# Altium PCB PCB1.PcbDoc (part 6 of 12)
Units mm, origin at the board's own origin, x right, y up, seen from the top; angles counter-clockwise.
Board outline 122.17 x 121.67 mm, 2 copper layers (Top Layer, Bottom Layer); 274 components, 225 nets, 941 pads, 421 vias.
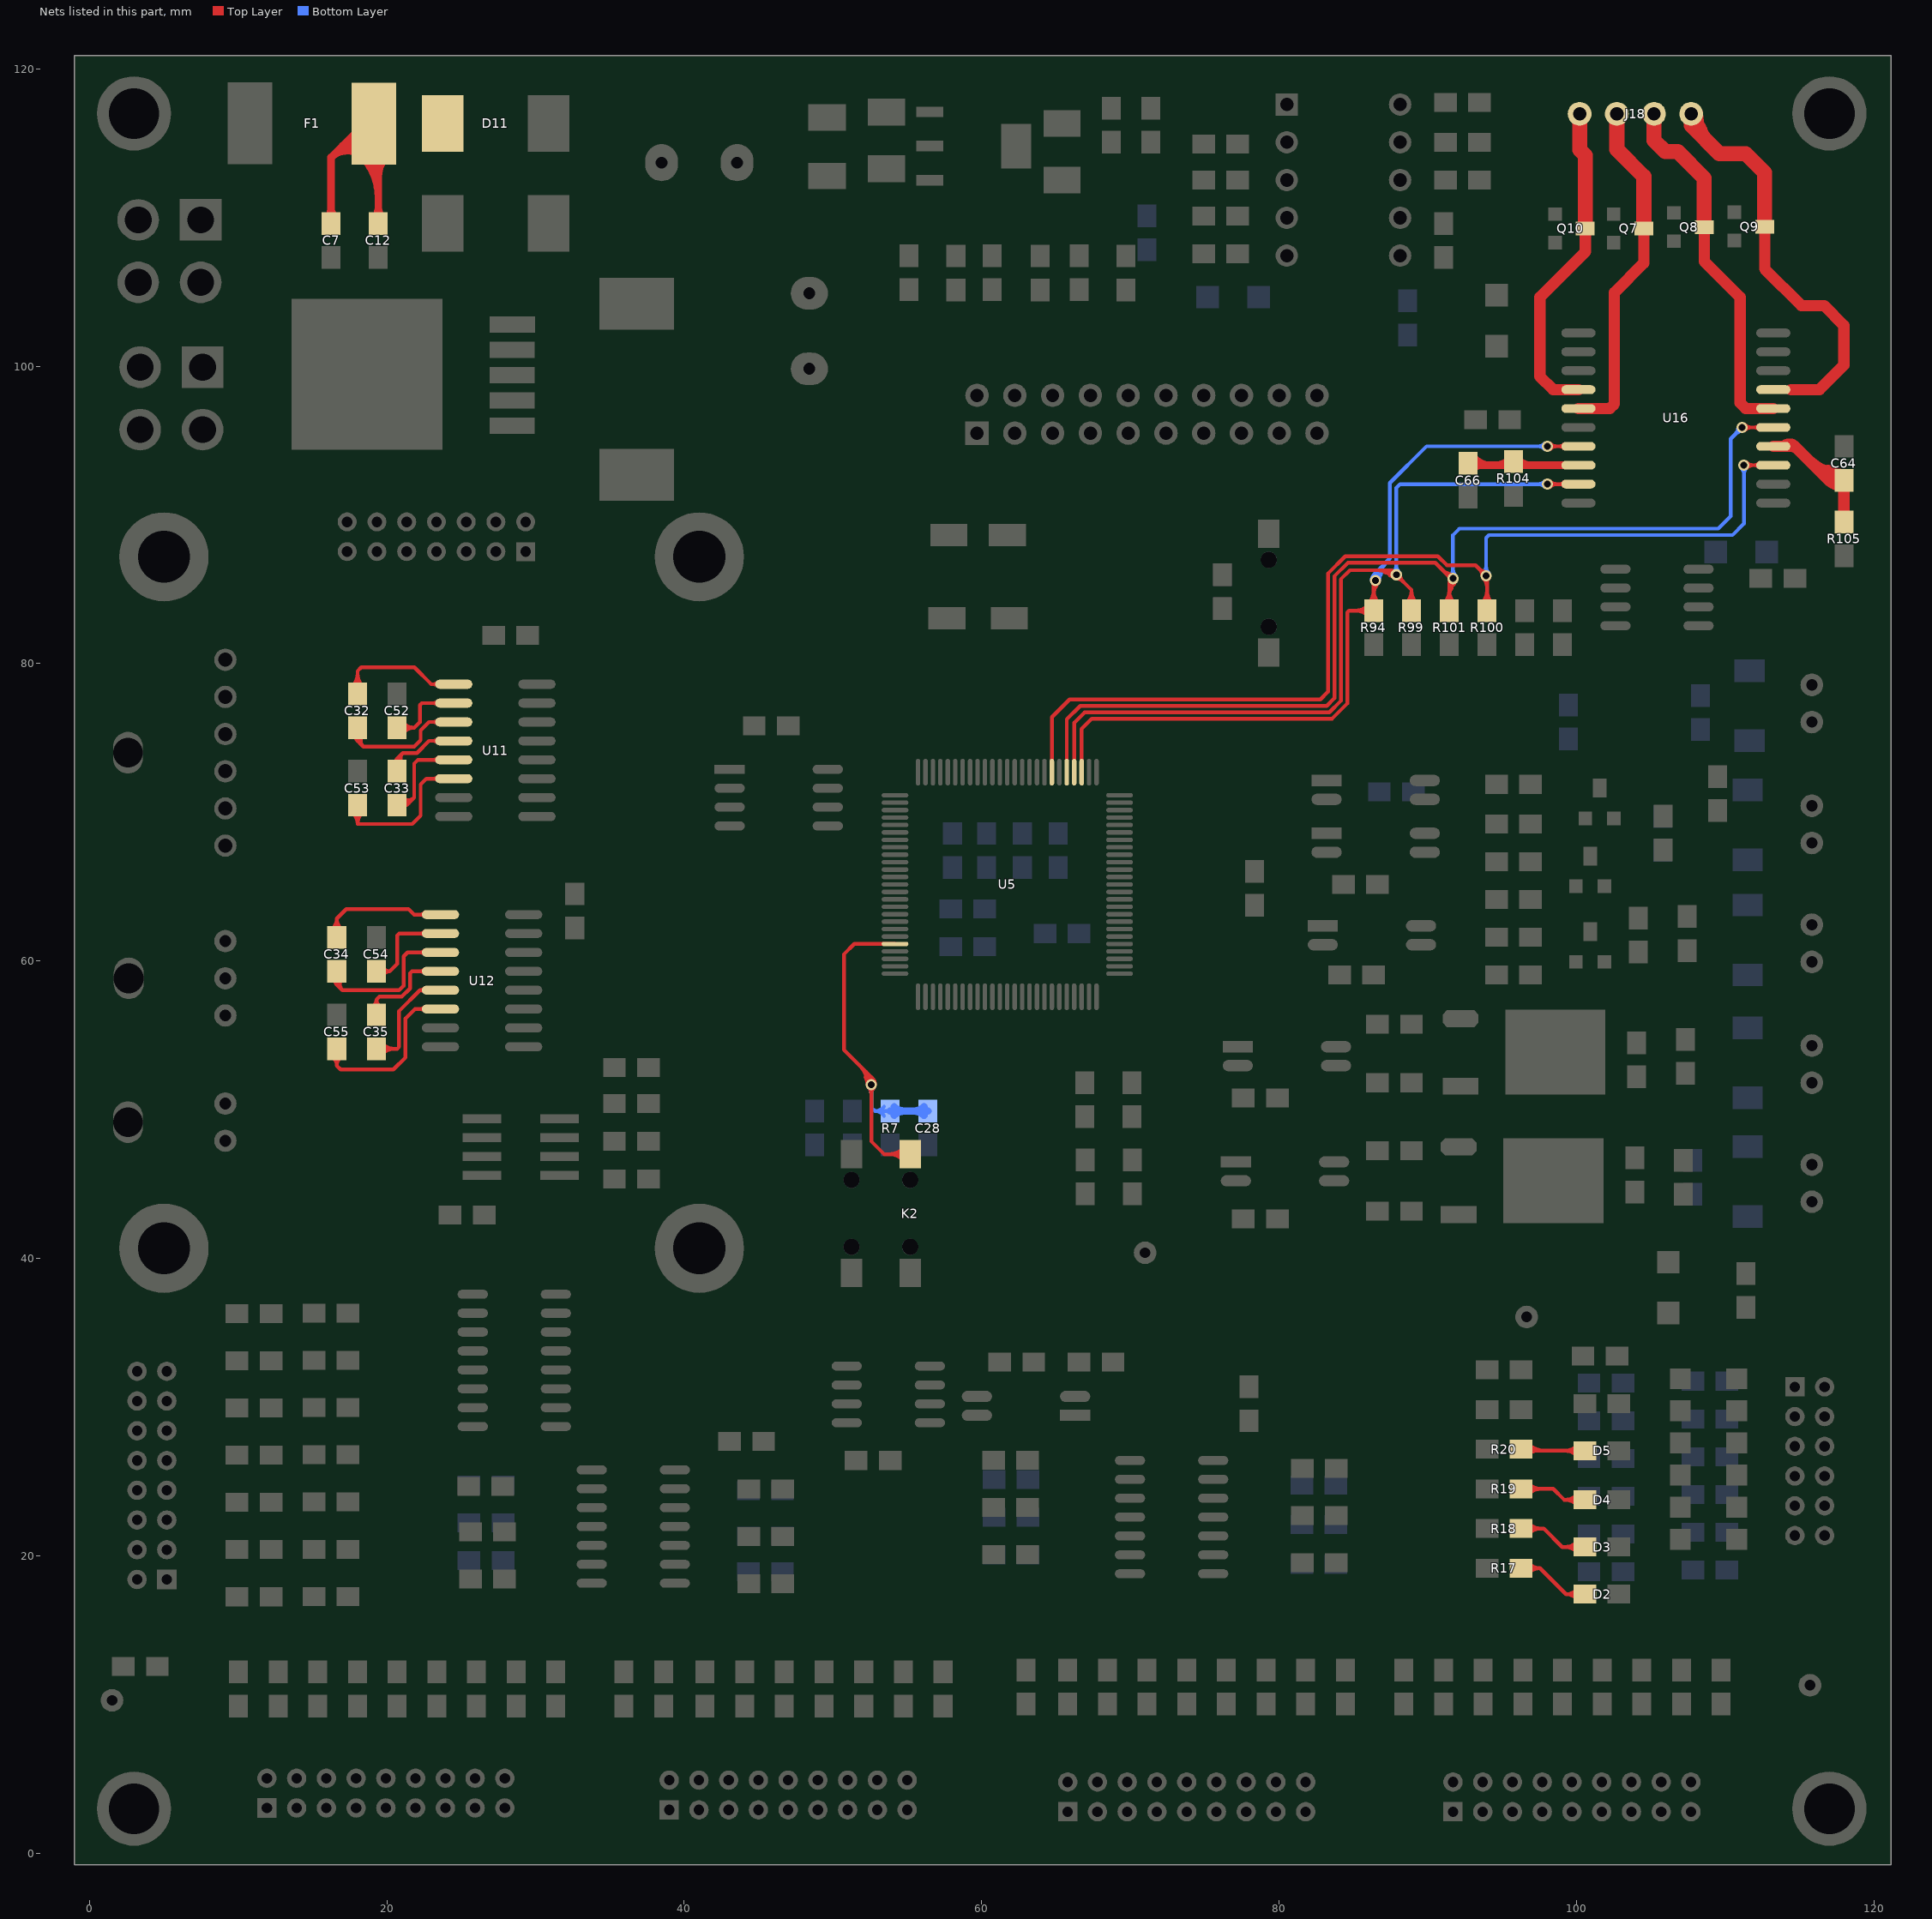
[diagram p6: the nets of this part, all layers, seen from the top]

## Via types
v1: diameter 0.762, hole 0.457, Top Layer to Bottom Layer, 339 vias
v2: diameter 1.27, hole 0.457, Top Layer to Bottom Layer, 39 vias
v3: diameter 0.889, hole 0.457, Top Layer to Bottom Layer, 21 vias
v4: diameter 1.27, hole 0.711, Top Layer to Bottom Layer, 12 vias
v5: diameter 1.524, hole 0.711, Top Layer to Bottom Layer, 5 vias
v6: diameter 1.016, hole 0.457, Top Layer to Bottom Layer, 3 vias
v7: diameter 0.711, hole 0.457, Top Layer to Bottom Layer, 1 vias
v8: diameter 1.524, hole 0.457, Top Layer to Bottom Layer, 1 vias

## Nets (pads, with @x,y where several pads share a name; then routed paths per layer and width w, separated by ;. In a path a pad name is that pad's centre, name@x,y a point inside that pad or via, vN(x,y) a via of type N, cw(c..) or ccw(c..) an arc to the next point about the centre after c; other vN are vias at no path point) (continued)
KEY2: C28.1 K2.2 R7.2 U5.46 | length 56.7
  Top Layer w0.254: 52.188,52.198 ccw(c52.997,52.414) v1(52.578,51.689) ; v1@52.358,51.816 ccw(c51.827,52.123) 52.419,52.281 ccw(c53.012,52.44) v1@52.705,51.909 ; U5.46@54.172,61.151 51.435,61.151 50.736,60.452 50.736,54.039 52.578,52.197 ; K2.2@55.187,47.011 53.446,47.011 52.578,47.879 v1(52.578,51.689) ; 52.578,51.076 cw(c53.191,51.076) 52.758,51.509 ccw(c53.191,51.076) 52.578,51.076 ; 52.578,51.076 ccw(c51.965,51.076) 52.398,51.509 cw(c51.965,51.076) 52.578,51.076 ; v1(52.578,51.689) ccw(c51.352,51.689) 52.219,52.556 cw(c51.352,51.689) v1(52.578,51.689) ; v1(52.578,51.689) 52.578,52.197 ; 52.578,52.197 cw(c52.197,52.197) 52.426,51.892 ccw(c52.197,52.197) 52.578,52.197 ; 52.578,52.197 ccw(c52.959,52.197) 52.73,51.892 cw(c52.959,52.197) 52.578,52.197 ; 53.755,47.011 cw(c53.755,45.579) 54.768,46.592 ccw(c53.755,45.579) 53.755,47.011 ; 53.755,47.011 ccw(c53.755,48.443) 54.768,47.43 cw(c53.755,48.443) 53.755,47.011 ; 54.369,47.011 cw(c54.369,46.193) 54.947,46.771 ccw(c54.369,46.193) 54.369,47.011 ; 54.369,47.011 ccw(c54.369,47.829) 54.947,47.251 cw(c54.369,47.829) 54.369,47.011 ; 51.785,52.99 cw(c50.484,51.689) 52.324,51.689 ccw(c50.484,51.689) 51.785,52.99 ; 52.652,52.123 cw(c52.219,51.689) 52.832,51.689 ccw(c52.219,51.689) 52.652,52.123
  Bottom Layer w0.254: v1(52.578,51.689) 52.578,50.165 52.832,49.911 ; R7.2@53.848,49.911 52.832,49.911 ; 52.578,51.076 cw(c53.191,51.076) 52.758,51.509 ccw(c53.191,51.076) 52.578,51.076 ; 52.578,51.076 ccw(c51.965,51.076) 52.398,51.509 cw(c51.965,51.076) 52.578,51.076 ; 52.832,49.911 cw(c52.832,49.149) 53.442,49.606 ccw(c52.832,49.149) 52.832,49.911 ; 52.832,49.911 ccw(c52.832,50.673) 53.442,50.216 cw(c52.832,50.673) 52.832,49.911
  Bottom Layer w0.508: R7.2@53.848,49.911 C28.1@56.388,49.911 ; R7.2@54.117,49.642 cw(c54.768,48.991) 54.768,49.911 ; R7.2@54.117,49.642 cw(c54.768,48.991) 54.768,49.911 ; R7.2@54.117,49.642 cw(c54.768,48.991) 54.768,49.911 ; R7.2@54.117,50.18 ccw(c54.768,50.831) 54.768,49.911 ; R7.2@54.117,50.18 ccw(c54.768,50.831) 54.768,49.911 ; R7.2@54.117,50.18 ccw(c54.768,50.831) 54.768,49.911 ; 55.468,49.911 cw(c55.468,48.991) C28.1@56.119,49.642 ; 55.468,49.911 ccw(c55.468,50.831) C28.1@56.119,50.18 ; 55.468,49.911 cw(c55.468,48.991) C28.1@56.119,49.642 ; 55.468,49.911 ccw(c55.468,50.831) C28.1@56.119,50.18 ; 55.468,49.911 cw(c55.468,48.991) C28.1@56.119,49.642 ; 55.468,49.911 ccw(c55.468,50.831) C28.1@56.119,50.18
MOTOR1+: J18.4 Q10.3 U16.4 | length 22
  Top Layer w0.762: U16.4@100.13,98.425 98.425,98.425 97.536,99.314 97.536,104.648 100.588,107.7 Q10.3@100.588,109.259
  Top Layer w1.016: J18.4@100.209,116.972 100.209,114.551 100.588,114.173 Q10.3@100.588,109.259
MOTOR1-: J18.3 Q7.3 U16.5 | length 23.6
  Top Layer w0.762: U16.5@100.13,97.155 102.235,97.155 102.546,97.466 102.546,104.959 104.525,106.938 Q7.3@104.525,109.259
  Top Layer w1.016: J18.3@102.709,116.972 102.709,114.588 104.525,112.772 Q7.3@104.525,109.259
MOTOR2+: J18.2 Q8.3 U16.16 | length 24.7
  Top Layer w0.762: Q8.3@108.585,109.347 108.585,107.061 110.998,104.648 110.998,97.536 111.379,97.155 U16.16@113.23,97.155
  Top Layer w1.016: J18.2@105.209,116.972 105.209,115.189 105.971,114.427 106.807,114.427 108.585,112.649 Q8.3@108.585,109.347
MOTOR2-: J18.1 Q9.3 U16.17 | length 38.2
  Top Layer w0.762: Q9.3@112.653,109.386 112.653,106.549 115.126,104.076 116.649,104.076 117.983,102.743 117.983,100.076 116.332,98.425 114.427,98.425
  Top Layer w1.016: J18.1@107.709,116.972 107.709,116.192 109.601,114.3 111.383,114.3 112.653,113.03 Q9.3@112.653,109.386 ; J18.1@107.987,116.883 ccw(c108.713,116.648) 108.174,116.109 ; J18.1@107.563,116.719 cw(c106.729,115.275) 108.341,115.707 ; J18.1@107.563,116.719 cw(c106.729,115.275) 108.341,115.707 ; J18.1@107.563,116.719 cw(c106.729,115.275) 108.341,115.707 ; J18.1@108.001,116.972 ccw(c110.591,116.972) 108.76,115.141 ; J18.1@108.001,116.972 ccw(c110.591,116.972) 108.76,115.141 ; J18.1@108.001,116.972 ccw(c110.591,116.972) 108.76,115.141
MOTOR_1F+: R94.2 U5.3 U16.7 | length 96
  Top Layer w0.254: U5.3@66.722,72.701 66.722,75.612 67.412,76.302 83.566,76.302 84.582,77.318 84.582,83.439 84.709,83.566 R94.2@86.36,83.566 86.36,85.471 v1(86.487,85.598) ; v1(98.044,94.615) U16.7@100.13,94.615 ; 85.134,83.566 cw(c85.134,82.34) R94.2@86.001,83.207 ; 85.134,83.566 ccw(c85.134,84.792) R94.2@86.001,83.925 ; 85.134,83.566 cw(c85.134,82.34) R94.2@86.001,83.207 ; 85.134,83.566 ccw(c85.134,84.792) R94.2@86.001,83.925 ; 85.134,83.566 cw(c85.134,82.34) R94.2@86.001,83.207 ; 85.134,83.566 ccw(c85.134,84.792) R94.2@86.001,83.925 ; 85.134,83.566 cw(c85.134,82.34) R94.2@86.001,83.207 ; 85.134,83.566 ccw(c85.134,84.792) R94.2@86.001,83.925 ; R94.2@86.001,84.052 ccw(c85.134,84.919) 86.36,84.919 ; R94.2@86.001,84.052 ccw(c85.134,84.919) 86.36,84.919 ; R94.2@86.001,84.052 ccw(c85.134,84.919) 86.36,84.919 ; R94.2@86.001,84.052 ccw(c85.134,84.919) 86.36,84.919 ; 86.36,84.678 cw(c87.407,84.678) v1@86.667,85.418 ; 86.36,84.678 cw(c87.407,84.678) v1@86.667,85.418 ; 86.36,84.678 cw(c87.407,84.678) v1@86.667,85.418 ; 86.36,84.919 ccw(c87.586,84.919) R94.2@86.719,84.052 ; 86.36,84.919 ccw(c87.586,84.919) R94.2@86.719,84.052 ; 86.36,84.919 ccw(c87.586,84.919) R94.2@86.719,84.052 ; 86.36,84.919 ccw(c87.586,84.919) R94.2@86.719,84.052 ; v1@98.224,94.435 cw(c98.657,94.002) 98.657,94.615 ; v1@98.224,94.435 cw(c98.657,94.002) 98.657,94.615 ; v1@98.224,94.435 cw(c98.657,94.002) 98.657,94.615 ; v1@98.224,94.435 cw(c98.657,94.002) 98.657,94.615 ; v1@98.224,94.795 ccw(c98.657,95.228) 98.657,94.615 ; v1@98.224,94.795 ccw(c98.657,95.228) 98.657,94.615 ; v1@98.224,94.795 ccw(c98.657,95.228) 98.657,94.615 ; v1@98.224,94.795 ccw(c98.657,95.228) 98.657,94.615 ; 98.862,94.615 cw(c98.862,94.197) U16.7@99.158,94.493 ; 98.862,94.615 ccw(c98.862,95.033) U16.7@99.158,94.737 ; 98.862,94.615 cw(c98.862,94.197) U16.7@99.158,94.493 ; 98.862,94.615 ccw(c98.862,95.033) U16.7@99.158,94.737 ; 98.862,94.615 cw(c98.862,94.197) U16.7@99.158,94.493 ; 98.862,94.615 ccw(c98.862,95.033) U16.7@99.158,94.737 ; 98.862,94.615 cw(c98.862,94.197) U16.7@99.158,94.493 ; 98.862,94.615 ccw(c98.862,95.033) U16.7@99.158,94.737
  Bottom Layer w0.254: v1(98.044,94.615) 89.916,94.615 87.452,92.151 87.452,87.071 86.487,86.106 ; v1@86.233,85.598 cw(c86.846,85.598) 86.413,86.032 ; v1@86.233,85.598 cw(c86.846,85.598) 86.413,86.032 ; v1@86.233,85.598 cw(c86.846,85.598) 86.413,86.032 ; v1@86.335,85.801 ccw(c86.106,86.106) 86.487,86.106 ; v1@86.335,85.801 ccw(c86.106,86.106) 86.487,86.106 ; v1@86.335,85.801 ccw(c86.106,86.106) 86.487,86.106 ; v1@86.36,85.818 ccw(c86.053,86.349) 86.646,86.19 ; v1@86.36,85.818 ccw(c86.053,86.349) 86.646,86.19 ; v1@86.36,85.818 ccw(c86.053,86.349) 86.646,86.19 ; v1(86.487,85.598) cw(c87.713,85.598) 86.846,86.465 ; v1(86.487,85.598) ccw(c86.068,86.323) 86.877,86.107 ; v1(86.487,85.598) ccw(c86.068,86.323) 86.877,86.107 ; v1(86.487,85.598) cw(c87.713,85.598) 86.846,86.465 ; v1(86.487,85.598) ccw(c86.068,86.323) 86.877,86.107 ; v1(86.487,85.598) cw(c87.713,85.598) 86.846,86.465 ; v1(86.487,85.598) 86.487,86.106 ; 86.487,86.106 ccw(c86.868,86.106) v1@86.639,85.801 ; 86.487,86.106 ccw(c86.868,86.106) v1@86.639,85.801 ; 86.487,86.106 ccw(c86.868,86.106) v1@86.639,85.801 ; 86.646,86.19 ccw(c87.238,86.032) v1@86.707,85.725 ; 86.646,86.19 ccw(c87.238,86.032) v1@86.707,85.725 ; 86.646,86.19 ccw(c87.238,86.032) v1@86.707,85.725 ; v1@86.741,85.598 cw(c88.581,85.598) 87.28,86.899 ; v1@86.741,85.598 cw(c88.581,85.598) 87.28,86.899 ; v1@86.741,85.598 cw(c88.581,85.598) 87.28,86.899 ; 97.431,94.615 cw(c97.431,94.002) v1@97.864,94.435 ; 97.431,94.615 ccw(c97.431,95.228) v1@97.864,94.795 ; 97.431,94.615 cw(c97.431,94.002) v1@97.864,94.435 ; 97.431,94.615 ccw(c97.431,95.228) v1@97.864,94.795 ; 97.431,94.615 cw(c97.431,94.002) v1@97.864,94.435 ; 97.431,94.615 ccw(c97.431,95.228) v1@97.864,94.795 ; 97.431,94.615 cw(c97.431,94.002) v1@97.864,94.435 ; 97.431,94.615 ccw(c97.431,95.228) v1@97.864,94.795
MOTOR_1F-: R99.2 U5.4 U16.9 | length 93.7
  Top Layer w0.254: U5.4@66.222,72.701 66.222,76.026 66.929,76.733 83.387,76.733 84.15,77.496 84.15,85.674 84.76,86.284 87.579,86.284 ; R99.2@88.9,83.566 88.9,84.963 v1(87.884,85.979) ; v1(98.044,92.075) U16.9@100.13,92.075 ; 86.535,86.284 cw(c86.535,84.63) v1@87.704,85.799 ; 86.535,86.284 cw(c86.535,84.63) v1@87.704,85.799 ; 86.535,86.284 cw(c86.535,84.63) v1@87.704,85.799 ; 87.086,86.157 ccw(c87.388,86.681) v1@87.737,86.186 ; 87.086,86.157 ccw(c87.388,86.681) v1@87.737,86.186 ; 87.086,86.157 ccw(c87.388,86.681) v1@87.737,86.186 ; 87.148,86.284 cw(c87.148,85.243) v1(87.884,85.979) ; 87.148,86.284 cw(c87.148,85.243) v1(87.884,85.979) ; 87.148,86.284 cw(c87.148,85.243) v1(87.884,85.979) ; 87.418,86.248 cw(c87.195,85.864) v1@87.633,85.937 ; 87.418,86.248 ccw(c87.64,86.633) v1@87.795,86.217 ; 87.418,86.248 cw(c87.195,85.864) v1@87.633,85.937 ; 87.418,86.248 ccw(c87.64,86.633) v1@87.795,86.217 ; 87.418,86.248 cw(c87.195,85.864) v1@87.633,85.937 ; 87.418,86.248 ccw(c87.64,86.633) v1@87.795,86.217 ; 87.429,85.958 ccw(c87.64,86.324) v1(87.884,85.979) ; 87.429,85.958 ccw(c87.64,86.324) v1(87.884,85.979) ; 87.429,85.958 ccw(c87.64,86.324) v1(87.884,85.979) ; 87.579,86.284 cw(c87.41,86.115) v1@87.64,86.049 ; 87.579,86.284 ccw(c87.748,86.453) v1@87.814,86.223 ; 87.579,86.284 cw(c87.41,86.115) v1@87.64,86.049 ; 87.579,86.284 ccw(c87.748,86.453) v1@87.814,86.223 ; 87.579,86.284 cw(c87.41,86.115) v1@87.64,86.049 ; 87.579,86.284 ccw(c87.748,86.453) v1@87.814,86.223 ; 87.579,86.284 v1(87.884,85.979) ; v1@87.884,85.725 cw(c87.884,85.112) 88.318,85.545 ; v1@87.884,85.725 cw(c87.884,85.112) 88.318,85.545 ; v1@87.884,85.725 cw(c87.884,85.112) 88.318,85.545 ; v1(87.884,85.979) cw(c87.795,85.544) 88.224,85.659 ; v1(87.884,85.979) ccw(c88.319,86.068) 88.204,85.639 ; v1(87.884,85.979) cw(c87.795,85.544) 88.224,85.659 ; v1(87.884,85.979) ccw(c88.319,86.068) 88.204,85.639 ; v1(87.884,85.979) cw(c87.795,85.544) 88.224,85.659 ; v1(87.884,85.979) ccw(c88.319,86.068) 88.204,85.639 ; v1@88.138,85.979 ccw(c88.751,85.979) 88.318,85.545 ; v1@88.138,85.979 ccw(c88.751,85.979) 88.318,85.545 ; v1@88.138,85.979 ccw(c88.751,85.979) 88.318,85.545 ; R99.2@88.541,84.052 ccw(c87.674,84.919) 88.9,84.919 ; R99.2@88.541,84.052 ccw(c87.674,84.919) 88.9,84.919 ; R99.2@88.541,84.052 ccw(c87.674,84.919) 88.9,84.919 ; 88.9,84.919 ccw(c90.126,84.919) R99.2@89.259,84.052 ; 88.9,84.919 ccw(c90.126,84.919) R99.2@89.259,84.052 ; 88.9,84.919 ccw(c90.126,84.919) R99.2@89.259,84.052 ; v1@98.224,91.895 cw(c98.657,91.462) 98.657,92.075 ; v1@98.224,91.895 cw(c98.657,91.462) 98.657,92.075 ; v1@98.224,91.895 cw(c98.657,91.462) 98.657,92.075 ; v1@98.224,91.895 cw(c98.657,91.462) 98.657,92.075 ; v1@98.224,92.255 ccw(c98.657,92.688) 98.657,92.075 ; v1@98.224,92.255 ccw(c98.657,92.688) 98.657,92.075 ; v1@98.224,92.255 ccw(c98.657,92.688) 98.657,92.075 ; v1@98.224,92.255 ccw(c98.657,92.688) 98.657,92.075 ; 98.862,92.075 cw(c98.862,91.657) U16.9@99.158,91.953 ; 98.862,92.075 ccw(c98.862,92.493) U16.9@99.158,92.197 ; 98.862,92.075 cw(c98.862,91.657) U16.9@99.158,91.953 ; 98.862,92.075 ccw(c98.862,92.493) U16.9@99.158,92.197 ; 98.862,92.075 cw(c98.862,91.657) U16.9@99.158,91.953 ; 98.862,92.075 ccw(c98.862,92.493) U16.9@99.158,92.197 ; 98.862,92.075 cw(c98.862,91.657) U16.9@99.158,91.953 ; 98.862,92.075 ccw(c98.862,92.493) U16.9@99.158,92.197
  Bottom Layer w0.254: v1(87.884,85.979) 87.884,91.821 88.138,92.075 v1(98.044,92.075) ; v1@87.704,86.159 ccw(c87.271,86.592) 87.884,86.592 ; v1@87.704,86.159 ccw(c87.271,86.592) 87.884,86.592 ; v1@87.704,86.159 ccw(c87.271,86.592) 87.884,86.592 ; 87.884,86.592 ccw(c88.497,86.592) v1@88.064,86.159 ; 87.884,86.592 ccw(c88.497,86.592) v1@88.064,86.159 ; 87.884,86.592 ccw(c88.497,86.592) v1@88.064,86.159 ; 97.431,92.075 cw(c97.431,91.462) v1@97.864,91.895 ; 97.431,92.075 ccw(c97.431,92.688) v1@97.864,92.255 ; 97.431,92.075 cw(c97.431,91.462) v1@97.864,91.895 ; 97.431,92.075 ccw(c97.431,92.688) v1@97.864,92.255 ; 97.431,92.075 cw(c97.431,91.462) v1@97.864,91.895 ; 97.431,92.075 ccw(c97.431,92.688) v1@97.864,92.255 ; 97.431,92.075 cw(c97.431,91.462) v1@97.864,91.895 ; 97.431,92.075 ccw(c97.431,92.688) v1@97.864,92.255
MOTOR_2F+: R100.2 U5.7 U16.13 | length 106.6
  Top Layer w0.254: U5.7@64.722,72.701 64.722,76.406 65.913,77.597 82.779,77.597 83.287,78.105 83.287,86.056 84.454,87.224 90.679,87.224 91.289,86.614 93.218,86.614 v1(93.916,85.915) ; R100.2@93.98,83.566 93.98,85.852 v1(93.916,85.915) ; v1(111.252,93.345) U16.13@113.23,93.345 ; 93.483,86.349 cw(c93.049,85.915) v1@93.662,85.915 ; 93.483,86.349 ccw(c93.916,86.783) v1@93.916,86.169 ; 93.483,86.349 cw(c93.049,85.915) v1@93.662,85.915 ; 93.483,86.349 ccw(c93.916,86.783) v1@93.916,86.169 ; 93.483,86.349 cw(c93.049,85.915) v1@93.662,85.915 ; 93.483,86.349 ccw(c93.916,86.783) v1@93.916,86.169 ; 93.483,86.349 cw(c93.049,85.915) v1@93.662,85.915 ; 93.483,86.349 ccw(c93.916,86.783) v1@93.916,86.169 ; 93.577,86.236 ccw(c94.006,86.35) v1(93.916,85.915) ; 93.577,86.236 ccw(c94.006,86.35) v1(93.916,85.915) ; 93.577,86.236 ccw(c94.006,86.35) v1(93.916,85.915) ; 93.577,86.236 ccw(c94.006,86.35) v1(93.916,85.915) ; 93.577,86.236 ccw(c94.006,86.35) v1(93.916,85.915) ; 93.577,86.236 ccw(c94.006,86.35) v1(93.916,85.915) ; 93.596,86.255 cw(c93.482,85.826) v1(93.916,85.915) ; 93.596,86.255 cw(c93.482,85.826) v1(93.916,85.915) ; 93.596,86.255 cw(c93.482,85.826) v1(93.916,85.915) ; 93.596,86.255 cw(c93.482,85.826) v1(93.916,85.915) ; 93.596,86.255 cw(c93.482,85.826) v1(93.916,85.915) ; 93.596,86.255 cw(c93.482,85.826) v1(93.916,85.915) ; R100.2@93.621,84.052 ccw(c92.754,84.919) 93.98,84.919 ; R100.2@93.621,84.052 ccw(c92.754,84.919) 93.98,84.919 ; R100.2@93.621,84.052 ccw(c92.754,84.919) 93.98,84.919 ; R100.2@93.621,84.052 ccw(c92.754,84.919) 93.98,84.919 ; v1@93.737,85.736 cw(c93.15,85.149) 93.98,85.149 ; v1@93.737,85.736 cw(c93.15,85.149) 93.98,85.149 ; v1@93.737,85.736 cw(c93.15,85.149) 93.98,85.149 ; v1@93.737,85.736 cw(c93.15,85.149) 93.98,85.149 ; 93.98,84.919 ccw(c95.206,84.919) R100.2@94.339,84.052 ; 93.98,84.919 ccw(c95.206,84.919) R100.2@94.339,84.052 ; 93.98,84.919 ccw(c95.206,84.919) R100.2@94.339,84.052 ; 93.98,84.919 ccw(c95.206,84.919) R100.2@94.339,84.052 ; 93.98,85.456 cw(c94.376,85.456) v1@94.096,85.736 ; 93.98,85.456 cw(c94.376,85.456) v1@94.096,85.736 ; 93.98,85.456 cw(c94.376,85.456) v1@94.096,85.736 ; 93.98,85.456 cw(c94.376,85.456) v1@94.096,85.736 ; v1@111.432,93.165 cw(c111.865,92.732) 111.865,93.345 ; v1@111.432,93.165 cw(c111.865,92.732) 111.865,93.345 ; v1@111.432,93.165 cw(c111.865,92.732) 111.865,93.345 ; v1@111.432,93.165 cw(c111.865,92.732) 111.865,93.345 ; v1@111.432,93.525 ccw(c111.865,93.958) 111.865,93.345 ; v1@111.432,93.525 ccw(c111.865,93.958) 111.865,93.345 ; v1@111.432,93.525 ccw(c111.865,93.958) 111.865,93.345 ; v1@111.432,93.525 ccw(c111.865,93.958) 111.865,93.345 ; 111.962,93.345 cw(c111.962,92.927) U16.13@112.258,93.223 ; 111.962,93.345 ccw(c111.962,93.763) U16.13@112.258,93.467 ; 111.962,93.345 cw(c111.962,92.927) U16.13@112.258,93.223 ; 111.962,93.345 ccw(c111.962,93.763) U16.13@112.258,93.467 ; 111.962,93.345 cw(c111.962,92.927) U16.13@112.258,93.223 ; 111.962,93.345 ccw(c111.962,93.763) U16.13@112.258,93.467 ; 111.962,93.345 cw(c111.962,92.927) U16.13@112.258,93.223 ; 111.962,93.345 ccw(c111.962,93.763) U16.13@112.258,93.467
  Bottom Layer w0.254: v1(93.916,85.915) 93.916,88.456 94.107,88.646 110.49,88.646 111.252,89.408 v1(111.252,93.345) ; v1@93.737,86.095 ccw(c93.303,86.529) 93.916,86.529 ; v1@93.737,86.095 ccw(c93.303,86.529) 93.916,86.529 ; v1@93.737,86.095 ccw(c93.303,86.529) 93.916,86.529 ; v1@93.737,86.095 ccw(c93.303,86.529) 93.916,86.529 ; 93.916,86.529 ccw(c94.53,86.529) v1@94.096,86.095 ; 93.916,86.529 ccw(c94.53,86.529) v1@94.096,86.095 ; 93.916,86.529 ccw(c94.53,86.529) v1@94.096,86.095 ; 93.916,86.529 ccw(c94.53,86.529) v1@94.096,86.095 ; v1@111.072,93.165 cw(c110.639,92.732) 111.252,92.732 ; v1@111.072,93.165 cw(c110.639,92.732) 111.252,92.732 ; v1@111.072,93.165 cw(c110.639,92.732) 111.252,92.732 ; v1@111.072,93.165 cw(c110.639,92.732) 111.252,92.732 ; 111.252,92.732 cw(c111.865,92.732) v1@111.432,93.165 ; 111.252,92.732 cw(c111.865,92.732) v1@111.432,93.165 ; 111.252,92.732 cw(c111.865,92.732) v1@111.432,93.165 ; 111.252,92.732 cw(c111.865,92.732) v1@111.432,93.165
MOTOR_2F-: R101.2 U5.5 U16.15 | length 119.5
  Top Layer w0.254: U5.5@65.722,72.701 65.722,76.263 66.624,77.165 83.208,77.165 83.718,77.675 83.718,85.877 84.633,86.792 90.5,86.792 91.313,85.979 ; R101.2@91.44,83.566 91.44,85.471 v1(91.694,85.725) ; v1(111.125,95.885) U16.15@113.23,95.885 ; 91.044,86.248 ccw(c91.694,86.899) v1@91.694,85.979 ; 91.044,86.248 ccw(c91.694,86.899) v1@91.694,85.979 ; 91.044,86.248 ccw(c91.694,86.899) v1@91.694,85.979 ; 91.044,86.248 ccw(c91.694,86.899) v1@91.694,85.979 ; R101.2@91.081,84.052 ccw(c90.214,84.919) 91.44,84.919 ; R101.2@91.081,84.052 ccw(c90.214,84.919) 91.44,84.919 ; R101.2@91.081,84.052 ccw(c90.214,84.919) 91.44,84.919 ; R101.2@91.081,84.052 ccw(c90.214,84.919) 91.44,84.919 ; 91.299,86.085 cw(c91.148,85.522) v1(91.694,85.725) ; 91.299,86.085 cw(c91.148,85.522) v1(91.694,85.725) ; 91.299,86.085 cw(c91.148,85.522) v1(91.694,85.725) ; 91.299,86.085 cw(c91.148,85.522) v1(91.694,85.725) ; 91.299,86.085 cw(c91.148,85.522) v1(91.694,85.725) ; 91.299,86.085 cw(c91.148,85.522) v1(91.694,85.725) ; 91.313,85.979 ccw(c91.462,86.128) v1@91.567,85.945 ; 91.313,85.979 ccw(c91.462,86.128) v1@91.567,85.945 ; 91.313,85.979 ccw(c91.462,86.128) v1@91.567,85.945 ; 91.313,85.979 ccw(c91.462,86.128) v1@91.567,85.945 ; 91.35,85.942 cw(c91.133,85.725) v1@91.44,85.725 ; 91.35,85.942 cw(c91.133,85.725) v1@91.44,85.725 ; 91.35,85.942 cw(c91.133,85.725) v1@91.44,85.725 ; 91.35,85.942 cw(c91.133,85.725) v1@91.44,85.725 ; 91.35,85.942 cw(c91.133,85.725) v1@91.44,85.725 ; 91.35,85.942 cw(c91.133,85.725) v1@91.44,85.725 ; 91.35,85.942 cw(c91.133,85.725) v1@91.44,85.725 ; 91.35,85.942 cw(c91.133,85.725) v1@91.44,85.725 ; 91.44,84.499 cw(c92.92,84.499) v1@91.874,85.545 ; 91.44,84.499 cw(c92.92,84.499) v1@91.874,85.545 ; 91.44,84.499 cw(c92.92,84.499) v1@91.874,85.545 ; 91.44,84.499 cw(c92.92,84.499) v1@91.874,85.545 ; 91.44,84.919 ccw(c92.666,84.919) R101.2@91.799,84.052 ; 91.44,84.919 ccw(c92.666,84.919) R101.2@91.799,84.052 ; 91.44,84.919 ccw(c92.666,84.919) R101.2@91.799,84.052 ; 91.44,84.919 ccw(c92.666,84.919) R101.2@91.799,84.052 ; 91.44,85.112 cw(c92.307,85.112) v1(91.694,85.725) ; 91.44,85.112 cw(c92.307,85.112) v1(91.694,85.725) ; 91.44,85.112 cw(c92.307,85.112) v1(91.694,85.725) ; 91.44,85.112 cw(c92.307,85.112) v1(91.694,85.725) ; 91.47,85.336 cw(c91.703,85.201) v1@91.698,85.471 ; 91.47,85.336 ccw(c91.236,85.471) v1@91.472,85.602 ; 91.47,85.336 cw(c91.703,85.201) v1@91.698,85.471 ; 91.47,85.336 ccw(c91.236,85.471) v1@91.472,85.602 ; 91.47,85.336 cw(c91.703,85.201) v1@91.698,85.471 ; 91.47,85.336 ccw(c91.236,85.471) v1@91.472,85.602 ; 91.47,85.336 cw(c91.703,85.201) v1@91.698,85.471 ; 91.47,85.336 ccw(c91.236,85.471) v1@91.472,85.602 ; 91.47,85.336 cw(c91.703,85.201) v1@91.698,85.471 ; 91.47,85.336 ccw(c91.236,85.471) v1@91.472,85.602 ; 91.47,85.336 cw(c91.703,85.201) v1@91.698,85.471 ; 91.47,85.336 ccw(c91.236,85.471) v1@91.472,85.602 ; v1@91.505,85.556 cw(c91.152,85.241) 91.561,85.004 ; v1@91.505,85.556 cw(c91.152,85.241) 91.561,85.004 ; v1@91.505,85.556 cw(c91.152,85.241) 91.561,85.004 ; v1@91.505,85.556 cw(c91.152,85.241) 91.561,85.004 ; v1@91.505,85.556 cw(c91.152,85.241) 91.561,85.004 ; v1@91.505,85.556 cw(c91.152,85.241) 91.561,85.004 ; v1(91.694,85.725) cw(c91.428,85.487) 91.737,85.309 ; v1(91.694,85.725) cw(c91.428,85.487) 91.737,85.309 ; v1(91.694,85.725) cw(c91.428,85.487) 91.737,85.309 ; v1(91.694,85.725) cw(c91.428,85.487) 91.737,85.309 ; v1(91.694,85.725) cw(c91.428,85.487) 91.737,85.309 ; v1(91.694,85.725) cw(c91.428,85.487) 91.737,85.309 ; v1@111.305,95.705 cw(c111.738,95.272) 111.738,95.885 ; v1@111.305,95.705 cw(c111.738,95.272) 111.738,95.885 ; v1@111.305,95.705 cw(c111.738,95.272) 111.738,95.885 ; v1@111.305,95.705 cw(c111.738,95.272) 111.738,95.885 ; v1@111.305,96.065 ccw(c111.738,96.498) 111.738,95.885 ; v1@111.305,96.065 ccw(c111.738,96.498) 111.738,95.885 ; v1@111.305,96.065 ccw(c111.738,96.498) 111.738,95.885 ; v1@111.305,96.065 ccw(c111.738,96.498) 111.738,95.885 ; 111.962,95.885 cw(c111.962,95.467) U16.15@112.258,95.763 ; 111.962,95.885 ccw(c111.962,96.303) U16.15@112.258,96.007 ; 111.962,95.885 cw(c111.962,95.467) U16.15@112.258,95.763 ; 111.962,95.885 ccw(c111.962,96.303) U16.15@112.258,96.007 ; 111.962,95.885 cw(c111.962,95.467) U16.15@112.258,95.763 ; 111.962,95.885 ccw(c111.962,96.303) U16.15@112.258,96.007 ; 111.962,95.885 cw(c111.962,95.467) U16.15@112.258,95.763 ; 111.962,95.885 ccw(c111.962,96.303) U16.15@112.258,96.007
  Bottom Layer w0.254: v1(91.694,85.725) 91.694,88.646 92.126,89.078 109.525,89.078 110.363,89.916 110.363,95.123 v1(111.125,95.885) ; v1@91.514,85.905 ccw(c91.081,86.338) 91.694,86.338 ; v1@91.514,85.905 ccw(c91.081,86.338) 91.694,86.338 ; v1@91.514,85.905 ccw(c91.081,86.338) 91.694,86.338 ; v1@91.514,85.905 ccw(c91.081,86.338) 91.694,86.338 ; 91.694,86.338 ccw(c92.307,86.338) v1@91.874,85.905 ; 91.694,86.338 ccw(c92.307,86.338) v1@91.874,85.905 ; 91.694,86.338 ccw(c92.307,86.338) v1@91.874,85.905 ; 91.694,86.338 ccw(c92.307,86.338) v1@91.874,85.905 ; 110.691,95.451 cw(c111.125,95.018) v1@111.125,95.631 ; 110.691,95.451 ccw(c110.258,95.885) v1@110.871,95.885 ; 110.691,95.451 cw(c111.125,95.018) v1@111.125,95.631 ; 110.691,95.451 ccw(c110.258,95.885) v1@110.871,95.885 ; 110.691,95.451 cw(c111.125,95.018) v1@111.125,95.631 ; 110.691,95.451 ccw(c110.258,95.885) v1@110.871,95.885 ; 110.691,95.451 cw(c111.125,95.018) v1@111.125,95.631 ; 110.691,95.451 ccw(c110.258,95.885) v1@110.871,95.885
NetC7_1: C7.1 C12.1 D11.1 F1.2 | length 89.3
  Top Layer w0.508: C7.1@16.256,109.601 16.256,114.046 ; C12.1@19.431,109.601 19.431,116.034 F1.2@19.144,116.322 18.532,116.322 16.256,114.046 ; C7.1@15.987,109.997 ccw(c15.336,110.648) 16.256,110.648 ; C7.1@15.987,109.997 ccw(c15.336,110.648) 16.256,110.648 ; C7.1@15.987,109.997 ccw(c15.336,110.648) 16.256,110.648 ; C7.1@15.987,109.997 ccw(c15.336,110.648) 16.256,110.648 ; 16.256,110.648 ccw(c17.176,110.648) C7.1@16.525,109.997 ; 16.256,110.648 ccw(c17.176,110.648) C7.1@16.525,109.997 ; 16.256,110.648 ccw(c17.176,110.648) C7.1@16.525,109.997 ; 16.256,110.648 ccw(c17.176,110.648) C7.1@16.525,109.997 ; 16.256,114.046 cw(c17.337,112.965) F1.2@18.333,114.126 ; 16.256,114.046 cw(c17.337,112.965) F1.2@18.333,114.126 ; 16.256,114.046 cw(c17.337,112.965) F1.2@18.333,114.126 ; 16.256,114.046 cw(c17.337,112.965) F1.2@18.333,114.126 ; 16.644,114.434 cw(c17.695,113.382) F1.2@18.663,114.511 ; 16.644,114.434 cw(c17.695,113.382) F1.2@18.663,114.511 ; 16.644,114.434 cw(c17.695,113.382) F1.2@18.663,114.511 ; 16.644,114.434 cw(c17.695,113.382) F1.2@18.663,114.511 ; 17.032,114.822 cw(c18.053,113.8) F1.2@18.994,114.897 ; 17.032,114.822 cw(c18.053,113.8) F1.2@18.994,114.897 ; 17.032,114.822 cw(c18.053,113.8) F1.2@18.994,114.897 ; 17.032,114.822 cw(c18.053,113.8) F1.2@18.994,114.897 ; 17.42,115.21 cw(c18.412,114.218) F1.2@19.325,115.283 ; 17.42,115.21 cw(c18.412,114.218) F1.2@19.325,115.283 ; 17.42,115.21 cw(c18.412,114.218) F1.2@19.325,115.283 ; 17.42,115.21 cw(c18.412,114.218) F1.2@19.325,115.283 ; F1.2@18.263,114.191 cw(c15.442,111.37) 19.431,111.37 ; F1.2@18.263,114.191 cw(c15.442,111.37) 19.431,111.37 ; F1.2@18.263,114.191 cw(c15.442,111.37) 19.431,111.37 ; F1.2@18.263,114.191 cw(c15.442,111.37) 19.431,111.37 ; F1.2@18.622,114.55 cw(c16.668,112.596) 19.431,112.596 ; F1.2@18.622,114.55 cw(c16.668,112.596) 19.431,112.596 ; F1.2@18.622,114.55 cw(c16.668,112.596) 19.431,112.596 ; F1.2@18.622,114.55 cw(c16.668,112.596) 19.431,112.596 ; C12.1@19.162,109.997 ccw(c18.511,110.648) 19.431,110.648 ; C12.1@19.162,109.997 ccw(c18.511,110.648) 19.431,110.648 ; C12.1@19.162,109.997 ccw(c18.511,110.648) 19.431,110.648 ; C12.1@19.162,109.997 ccw(c18.511,110.648) 19.431,110.648 ; 19.431,110.648 ccw(c20.351,110.648) C12.1@19.7,109.997 ; 19.431,110.648 ccw(c20.351,110.648) C12.1@19.7,109.997 ; 19.431,110.648 ccw(c20.351,110.648) C12.1@19.7,109.997 ; 19.431,110.648 ccw(c20.351,110.648) C12.1@19.7,109.997 ; 19.431,112.757 cw(c21.458,112.757) F1.2@20.025,114.191 ; 19.431,112.757 cw(c21.458,112.757) F1.2@20.025,114.191 ; 19.431,112.757 cw(c21.458,112.757) F1.2@20.025,114.191 ; 19.431,112.757 cw(c21.458,112.757) F1.2@20.025,114.191
NetC32_1: C32.1 U11.3 | length 25.1
  Top Layer w0.254: C32.1@18.034,75.692 18.034,74.803 ; U11.3@23.817,75.951 ccw(c23.513,75.647) 23.513,76.077 ccw(c23.513,76.506) U11.3@23.817,76.202 ; U11.3@24.888,76.077 22.839,76.077 22.276,75.514 22.276,74.854 21.844,74.422 18.415,74.422 ; C32.1@17.839,75.096 cw(c17.717,74.803) 18.034,74.803 ; C32.1@17.839,75.096 cw(c17.717,74.803) 18.034,74.803 ; C32.1@17.839,75.096 cw(c17.717,74.803) 18.034,74.803 ; C32.1@17.839,75.096 cw(c17.717,74.803) 18.034,74.803 ; 18.034,74.803 cw(c18.351,74.803) C32.1@18.229,75.096 ; 18.034,74.803 cw(c18.351,74.803) C32.1@18.229,75.096 ; 18.034,74.803 cw(c18.351,74.803) C32.1@18.229,75.096 ; 18.034,74.803 cw(c18.351,74.803) C32.1@18.229,75.096 ; 18.034,74.803 18.415,74.422 ; C32.1@18.034,75.565 ccw(c18.438,75.184) 18.045,74.792 ; C32.1@18.034,75.565 ccw(c18.438,75.184) 18.045,74.792 ; C32.1@18.034,75.565 ccw(c18.438,75.184) 18.045,74.792 ; C32.1@18.034,75.565 ccw(c18.438,75.184) 18.045,74.792 ; C32.1@18.219,75.391 ccw(c18.628,75.005) 18.23,74.607 ; C32.1@18.219,75.391 ccw(c18.628,75.005) 18.23,74.607 ; C32.1@18.219,75.391 ccw(c18.628,75.005) 18.23,74.607 ; C32.1@18.219,75.391 ccw(c18.628,75.005) 18.23,74.607 ; C32.1@18.403,75.216 ccw(c18.818,74.825) 18.415,74.422 ; C32.1@18.403,75.216 ccw(c18.818,74.825) 18.415,74.422 ; C32.1@18.403,75.216 ccw(c18.818,74.825) 18.415,74.422 ; C32.1@18.403,75.216 ccw(c18.818,74.825) 18.415,74.422 ; 23.132,76.077 cw(c23.132,75.647) U11.3@23.436,75.951 ; 23.132,76.077 ccw(c23.132,76.506) U11.3@23.436,76.202 ; 23.132,76.077 cw(c23.132,75.647) U11.3@23.436,75.951 ; 23.132,76.077 ccw(c23.132,76.506) U11.3@23.436,76.202 ; 23.132,76.077 cw(c23.132,75.647) U11.3@23.436,75.951 ; 23.132,76.077 ccw(c23.132,76.506) U11.3@23.436,76.202
NetC32_2: C32.2 U11.1 | length 18
  Top Layer w0.254: C32.2@18.034,77.978 18.034,79.502 18.288,79.756 21.851,79.756 22.991,78.617 U11.1@24.507,78.617 ; U11.1@24.507,78.613 24.884,78.613 U11.1@24.888,78.617 ; C32.2@17.675,78.464 ccw(c16.808,79.331) 18.034,79.331 ; C32.2@17.675,78.464 ccw(c16.808,79.331) 18.034,79.331 ; C32.2@17.675,78.464 ccw(c16.808,79.331) 18.034,79.331 ; C32.2@17.675,78.464 ccw(c16.808,79.331) 18.034,79.331 ; 18.034,79.331 ccw(c19.26,79.331) C32.2@18.393,78.464 ; 18.034,79.331 ccw(c19.26,79.331) C32.2@18.393,78.464 ; 18.034,79.331 ccw(c19.26,79.331) C32.2@18.393,78.464 ; 18.034,79.331 ccw(c19.26,79.331) C32.2@18.393,78.464 ; 23.132,78.617 cw(c23.132,78.187) 23.436,78.491 ccw(c23.132,78.187) 23.132,78.617 ; 23.132,78.617 ccw(c23.132,79.046) 23.436,78.742 cw(c23.132,79.046) 23.132,78.617
NetC33_1: C33.1 U11.4 | length 20.4
  Top Layer w0.254: C33.1@20.701,72.771 20.701,73.609 ; U11.4@23.817,74.681 ccw(c23.513,74.377) 23.513,74.807 ccw(c23.513,75.236) U11.4@23.817,74.932 ; U11.4@24.888,74.807 22.839,74.807 22.023,73.99 21.082,73.99 ; C33.1@20.536,73.379 ccw(c20.457,73.609) 20.701,73.609 ; C33.1@20.536,73.379 ccw(c20.457,73.609) 20.701,73.609 ; C33.1@20.536,73.379 ccw(c20.457,73.609) 20.701,73.609 ; C33.1@20.536,73.379 ccw(c20.457,73.609) 20.701,73.609 ; C33.1@20.701,72.898 cw(c21.078,73.253) 20.712,73.62 ; C33.1@20.701,72.898 cw(c21.078,73.253) 20.712,73.62 ; C33.1@20.701,72.898 cw(c21.078,73.253) 20.712,73.62 ; C33.1@20.701,72.898 cw(c21.078,73.253) 20.712,73.62 ; 20.701,73.609 ccw(c20.945,73.609) C33.1@20.866,73.379 ; 20.701,73.609 ccw(c20.945,73.609) C33.1@20.866,73.379 ; 20.701,73.609 ccw(c20.945,73.609) C33.1@20.866,73.379 ; 20.701,73.609 ccw(c20.945,73.609) C33.1@20.866,73.379 ; 20.701,73.609 21.082,73.99 ; C33.1@20.886,73.072 cw(c21.269,73.433) 20.897,73.805 ; C33.1@20.886,73.072 cw(c21.269,73.433) 20.897,73.805 ; C33.1@20.886,73.072 cw(c21.269,73.433) 20.897,73.805 ; C33.1@20.886,73.072 cw(c21.269,73.433) 20.897,73.805 ; C33.1@21.071,73.246 cw(c21.46,73.612) 21.082,73.99 ; C33.1@21.071,73.246 cw(c21.46,73.612) 21.082,73.99 ; C33.1@21.071,73.246 cw(c21.46,73.612) 21.082,73.99 ; C33.1@21.071,73.246 cw(c21.46,73.612) 21.082,73.99 ; 23.132,74.807 cw(c23.132,74.377) U11.4@23.436,74.681 ; 23.132,74.807 ccw(c23.132,75.236) U11.4@23.436,74.932 ; 23.132,74.807 cw(c23.132,74.377) U11.4@23.436,74.681 ; 23.132,74.807 ccw(c23.132,75.236) U11.4@23.436,74.932 ; 23.132,74.807 cw(c23.132,74.377) U11.4@23.436,74.681 ; 23.132,74.807 ccw(c23.132,75.236) U11.4@23.436,74.932
NetC33_2: C33.2 U11.5 | length 19.9
  Top Layer w0.254: C33.2@20.701,70.485 21.336,70.485 21.844,70.993 ; U11.5@23.817,73.411 ccw(c23.513,73.107) 23.513,73.537 ccw(c23.513,73.966) U11.5@23.817,73.662 ; U11.5@24.888,73.537 22.102,73.537 21.844,73.279 21.844,70.993 ; C33.2@20.701,70.612 ccw(c21.082,71.016) 21.474,70.623 ; C33.2@20.701,70.612 ccw(c21.082,71.016) 21.474,70.623 ; C33.2@20.701,70.612 ccw(c21.082,71.016) 21.474,70.623 ; C33.2@20.701,70.612 ccw(c21.082,71.016) 21.474,70.623 ; C33.2@20.875,70.797 ccw(c21.261,71.206) 21.659,70.808 ; C33.2@20.875,70.797 ccw(c21.261,71.206) 21.659,70.808 ; C33.2@20.875,70.797 ccw(c21.261,71.206) 21.659,70.808 ; C33.2@20.875,70.797 ccw(c21.261,71.206) 21.659,70.808 ; C33.2@21.05,70.981 ccw(c21.441,71.396) 21.844,70.993 ; C33.2@21.05,70.981 ccw(c21.441,71.396) 21.844,70.993 ; C33.2@21.05,70.981 ccw(c21.441,71.396) 21.844,70.993 ; C33.2@21.05,70.981 ccw(c21.441,71.396) 21.844,70.993 ; 23.132,73.537 cw(c23.132,73.107) U11.5@23.436,73.411 ; 23.132,73.537 ccw(c23.132,73.966) U11.5@23.436,73.662 ; 23.132,73.537 cw(c23.132,73.107) U11.5@23.436,73.411 ; 23.132,73.537 ccw(c23.132,73.966) U11.5@23.436,73.662 ; 23.132,73.537 cw(c23.132,73.107) U11.5@23.436,73.411 ; 23.132,73.537 ccw(c23.132,73.966) U11.5@23.436,73.662
NetC34_1: C34.1 U12.3 | length 26.3
  Top Layer w0.254: C34.1@16.637,59.309 16.637,58.42 ; U12.3@22.547,60.457 ccw(c22.243,60.153) 22.243,60.583 ccw(c22.243,61.012) U12.3@22.547,60.708 ; U12.3@23.618,60.583 21.39,60.583 21.133,60.325 21.133,58.344 20.828,58.039 17.018,58.039 ; C34.1@16.442,58.713 cw(c16.32,58.42) 16.637,58.42 ; C34.1@16.442,58.713 cw(c16.32,58.42) 16.637,58.42 ; C34.1@16.442,58.713 cw(c16.32,58.42) 16.637,58.42 ; C34.1@16.442,58.713 cw(c16.32,58.42) 16.637,58.42 ; 16.637,58.42 cw(c16.954,58.42) C34.1@16.832,58.713 ; 16.637,58.42 cw(c16.954,58.42) C34.1@16.832,58.713 ; 16.637,58.42 cw(c16.954,58.42) C34.1@16.832,58.713 ; 16.637,58.42 cw(c16.954,58.42) C34.1@16.832,58.713 ; 16.637,58.42 17.018,58.039 ; C34.1@16.637,59.182 ccw(c17.041,58.801) 16.648,58.409 ; C34.1@16.637,59.182 ccw(c17.041,58.801) 16.648,58.409 ; C34.1@16.637,59.182 ccw(c17.041,58.801) 16.648,58.409 ; C34.1@16.637,59.182 ccw(c17.041,58.801) 16.648,58.409 ; C34.1@16.822,59.008 ccw(c17.231,58.622) 16.833,58.224 ; C34.1@16.822,59.008 ccw(c17.231,58.622) 16.833,58.224 ; C34.1@16.822,59.008 ccw(c17.231,58.622) 16.833,58.224 ; C34.1@16.822,59.008 ccw(c17.231,58.622) 16.833,58.224 ; C34.1@17.006,58.833 ccw(c17.421,58.442) 17.018,58.039 ; C34.1@17.006,58.833 ccw(c17.421,58.442) 17.018,58.039 ; C34.1@17.006,58.833 ccw(c17.421,58.442) 17.018,58.039 ; C34.1@17.006,58.833 ccw(c17.421,58.442) 17.018,58.039 ; 22.23,60.583 ccw(c22.23,61.024) U12.3@22.542,60.712 ; 22.23,60.583 ccw(c22.23,61.024) U12.3@22.542,60.712 ; 22.23,60.583 ccw(c22.23,61.024) U12.3@22.542,60.712 ; 22.247,60.583 cw(c22.247,60.166) U12.3@22.542,60.46 ; 22.247,60.583 cw(c22.247,60.166) U12.3@22.542,60.46 ; 22.247,60.583 cw(c22.247,60.166) U12.3@22.542,60.46
NetC34_2: C34.2 U12.1 | length 18.3
  Top Layer w0.254: C34.2@16.637,61.595 16.637,62.865 ; U12.1@22.547,62.997 ccw(c22.243,62.693) 22.243,63.123 ccw(c22.243,63.552) U12.1@22.547,63.248 ; U12.1@23.618,63.123 21.84,63.123 21.463,63.5 17.272,63.5 16.637,62.865 ; C34.2@16.297,62.099 ccw(c15.605,62.865) 16.637,62.865 ; C34.2@16.297,62.099 ccw(c15.605,62.865) 16.637,62.865 ; C34.2@16.297,62.099 ccw(c15.605,62.865) 16.637,62.865 ; C34.2@16.297,62.099 ccw(c15.605,62.865) 16.637,62.865 ; 16.637,62.865 ccw(c17.669,62.865) C34.2@16.977,62.099 ; 16.637,62.865 ccw(c17.669,62.865) C34.2@16.977,62.099 ; 16.637,62.865 ccw(c17.669,62.865) C34.2@16.977,62.099 ; 16.637,62.865 ccw(c17.669,62.865) C34.2@16.977,62.099 ; 22.23,63.123 ccw(c22.23,63.564) U12.1@22.542,63.252 ; 22.23,63.123 ccw(c22.23,63.564) U12.1@22.542,63.252 ; 22.23,63.123 ccw(c22.23,63.564) U12.1@22.542,63.252 ; 22.247,63.123 cw(c22.247,62.706) U12.1@22.542,63 ; 22.247,63.123 cw(c22.247,62.706) U12.1@22.542,63 ; 22.247,63.123 cw(c22.247,62.706) U12.1@22.542,63
NetC35_1: C35.1 U12.4 | length 13.8
  Top Layer w0.254: C35.1@19.304,56.388 19.304,57.404 ; U12.4@22.547,59.187 ccw(c22.243,58.883) 22.243,59.313 ccw(c22.243,59.742) U12.4@22.547,59.438 ; U12.4@23.618,59.313 21.695,59.313 21.565,59.182 21.565,58.165 21.007,57.607 19.507,57.607 19.304,57.404 ; C35.1@19.046,56.953 ccw(c18.78,57.404) 19.304,57.404 ; C35.1@19.046,56.953 ccw(c18.78,57.404) 19.304,57.404 ; C35.1@19.046,56.953 ccw(c18.78,57.404) 19.304,57.404 ; C35.1@19.046,56.953 ccw(c18.78,57.404) 19.304,57.404 ; 19.304,57.404 ccw(c19.828,57.404) C35.1@19.562,56.953 ; 19.304,57.404 ccw(c19.828,57.404) C35.1@19.562,56.953 ; 19.304,57.404 ccw(c19.828,57.404) C35.1@19.562,56.953 ; 19.304,57.404 ccw(c19.828,57.404) C35.1@19.562,56.953 ; 22.23,59.313 ccw(c22.23,59.754) U12.4@22.542,59.442 ; 22.23,59.313 ccw(c22.23,59.754) U12.4@22.542,59.442 ; 22.23,59.313 ccw(c22.23,59.754) U12.4@22.542,59.442 ; 22.247,59.313 cw(c22.247,58.896) U12.4@22.542,59.19 ; 22.247,59.313 cw(c22.247,58.896) U12.4@22.542,59.19 ; 22.247,59.313 cw(c22.247,58.896) U12.4@22.542,59.19
NetC35_2: C35.2 U12.5 | length 17.8
  Top Layer w0.254: C35.2@19.304,54.102 20.701,54.102 20.828,54.229 20.828,56.642 22.229,58.043 U12.5@23.618,58.043 ; U12.5@22.547,57.917 ccw(c22.243,57.613) 22.243,58.043 ccw(c22.243,58.472) U12.5@22.547,58.168 ; C35.2@19.663,53.743 cw(c20.53,52.876) 20.53,54.102 ; C35.2@19.663,53.743 cw(c20.53,52.876) 20.53,54.102 ; C35.2@19.663,53.743 cw(c20.53,52.876) 20.53,54.102 ; C35.2@19.663,53.743 cw(c20.53,52.876) 20.53,54.102 ; C35.2@19.663,54.461 ccw(c20.53,55.328) 20.53,54.102 ; C35.2@19.663,54.461 ccw(c20.53,55.328) 20.53,54.102 ; C35.2@19.663,54.461 ccw(c20.53,55.328) 20.53,54.102 ; C35.2@19.663,54.461 ccw(c20.53,55.328) 20.53,54.102 ; 22.23,58.043 ccw(c22.23,58.484) U12.5@22.542,58.172 ; 22.23,58.043 ccw(c22.23,58.484) U12.5@22.542,58.172 ; 22.23,58.043 ccw(c22.23,58.484) U12.5@22.542,58.172 ; 22.247,58.043 cw(c22.247,57.626) U12.5@22.542,57.92 ; 22.247,58.043 cw(c22.247,57.626) U12.5@22.542,57.92 ; 22.247,58.043 cw(c22.247,57.626) U12.5@22.542,57.92
NetC52_1: C52.1 U11.2 | length 15.1
  Top Layer w0.254: C52.1@20.701,75.692 21.844,75.692 ; U11.2@23.817,77.221 ccw(c23.513,76.917) 23.513,77.347 ccw(c23.513,77.776) U11.2@23.817,77.472 ; U11.2@24.888,77.347 22.356,77.347 22.225,77.216 22.225,76.073 21.844,75.692 ; C52.1@21.078,75.352 cw(c21.844,74.66) 21.844,75.692 ; C52.1@21.078,75.352 cw(c21.844,74.66) 21.844,75.692 ; C52.1@21.078,75.352 cw(c21.844,74.66) 21.844,75.692 ; C52.1@21.078,75.352 cw(c21.844,74.66) 21.844,75.692 ; C52.1@21.078,76.032 ccw(c21.844,76.724) 21.844,75.692 ; C52.1@21.078,76.032 ccw(c21.844,76.724) 21.844,75.692 ; C52.1@21.078,76.032 ccw(c21.844,76.724) 21.844,75.692 ; C52.1@21.078,76.032 ccw(c21.844,76.724) 21.844,75.692 ; 23.132,77.347 cw(c23.132,76.917) U11.2@23.436,77.221 ; 23.132,77.347 ccw(c23.132,77.776) U11.2@23.436,77.472 ; 23.132,77.347 cw(c23.132,76.917) U11.2@23.436,77.221 ; 23.132,77.347 ccw(c23.132,77.776) U11.2@23.436,77.472 ; 23.132,77.347 cw(c23.132,76.917) U11.2@23.436,77.221 ; 23.132,77.347 ccw(c23.132,77.776) U11.2@23.436,77.472
NetC53_1: C53.1 U11.6 | length 20.2
  Top Layer w0.254: C53.1@18.034,70.485 18.034,69.215 ; U11.6@23.817,72.141 ccw(c23.513,71.837) 23.513,72.267 ccw(c23.513,72.696) U11.6@23.817,72.392 ; U11.6@24.888,72.267 22.66,72.267 22.276,71.882 22.276,69.774 21.717,69.215 18.034,69.215 ; C53.1@17.694,69.981 cw(c17.002,69.215) 18.034,69.215 ; C53.1@17.694,69.981 cw(c17.002,69.215) 18.034,69.215 ; C53.1@17.694,69.981 cw(c17.002,69.215) 18.034,69.215 ; C53.1@17.694,69.981 cw(c17.002,69.215) 18.034,69.215 ; 18.034,69.215 cw(c19.066,69.215) C53.1@18.374,69.981 ; 18.034,69.215 cw(c19.066,69.215) C53.1@18.374,69.981 ; 18.034,69.215 cw(c19.066,69.215) C53.1@18.374,69.981 ; 18.034,69.215 cw(c19.066,69.215) C53.1@18.374,69.981 ; 23.132,72.267 cw(c23.132,71.837) U11.6@23.436,72.141 ; 23.132,72.267 ccw(c23.132,72.696) U11.6@23.436,72.392 ; 23.132,72.267 cw(c23.132,71.837) U11.6@23.436,72.141 ; 23.132,72.267 ccw(c23.132,72.696) U11.6@23.436,72.392 ; 23.132,72.267 cw(c23.132,71.837) U11.6@23.436,72.141 ; 23.132,72.267 ccw(c23.132,72.696) U11.6@23.436,72.392
NetC54_1: C54.1 U12.2 | length 13.5
  Top Layer w0.254: C54.1@19.304,59.309 20.193,59.309 ; U12.2@22.547,61.727 ccw(c22.243,61.423) 22.243,61.853 ccw(c22.243,62.282) U12.2@22.547,61.978 ; U12.2@23.618,61.853 20.832,61.853 20.701,61.722 20.701,59.817 20.193,59.309 ; C54.1@19.742,59.051 cw(c20.193,58.785) 20.193,59.309 ; C54.1@19.742,59.051 cw(c20.193,58.785) 20.193,59.309 ; C54.1@19.742,59.051 cw(c20.193,58.785) 20.193,59.309 ; C54.1@19.742,59.051 cw(c20.193,58.785) 20.193,59.309 ; C54.1@19.742,59.567 ccw(c20.193,59.833) 20.193,59.309 ; C54.1@19.742,59.567 ccw(c20.193,59.833) 20.193,59.309 ; C54.1@19.742,59.567 ccw(c20.193,59.833) 20.193,59.309 ; C54.1@19.742,59.567 ccw(c20.193,59.833) 20.193,59.309 ; 22.23,61.853 ccw(c22.23,62.294) U12.2@22.542,61.982 ; 22.23,61.853 ccw(c22.23,62.294) U12.2@22.542,61.982 ; 22.23,61.853 ccw(c22.23,62.294) U12.2@22.542,61.982 ; 22.247,61.853 cw(c22.247,61.436) U12.2@22.542,61.73 ; 22.247,61.853 cw(c22.247,61.436) U12.2@22.542,61.73 ; 22.247,61.853 cw(c22.247,61.436) U12.2@22.542,61.73
NetC55_1: C55.1 U12.6 | length 19.8
  Top Layer w0.254: C55.1@16.637,54.102 16.637,52.959 ; U12.6@22.547,56.647 ccw(c22.243,56.343) 22.243,56.773 ccw(c22.243,57.202) U12.6@22.547,56.898 ; U12.6@23.618,56.773 21.898,56.773 21.26,56.134 21.26,53.518 20.447,52.705 16.891,52.705 16.637,52.959 ; C55.1@16.332,53.569 cw(c15.875,52.959) 16.637,52.959 ; C55.1@16.332,53.569 cw(c15.875,52.959) 16.637,52.959 ; C55.1@16.332,53.569 cw(c15.875,52.959) 16.637,52.959 ; C55.1@16.332,53.569 cw(c15.875,52.959) 16.637,52.959 ; 16.637,52.959 cw(c17.399,52.959) C55.1@16.942,53.569 ; 16.637,52.959 cw(c17.399,52.959) C55.1@16.942,53.569 ; 16.637,52.959 cw(c17.399,52.959) C55.1@16.942,53.569 ; 16.637,52.959 cw(c17.399,52.959) C55.1@16.942,53.569 ; 22.23,56.773 ccw(c22.23,57.214) U12.6@22.542,56.902 ; 22.23,56.773 ccw(c22.23,57.214) U12.6@22.542,56.902 ; 22.23,56.773 ccw(c22.23,57.214) U12.6@22.542,56.902 ; 22.247,56.773 cw(c22.247,56.356) U12.6@22.542,56.65 ; 22.247,56.773 cw(c22.247,56.356) U12.6@22.542,56.65 ; 22.247,56.773 cw(c22.247,56.356) U12.6@22.542,56.65
NetC64_1: C64.1 R105.2 U16.14 | length 40.4
  Top Layer w0.762: U16.14@113.23,94.615 114.681,94.615 ; R105.2@117.983,89.535 C64.1@117.983,92.329 116.967,92.329 114.681,94.615 ; U16.14@114.036,94.683 cw(c114.316,94.25) 114.681,94.615 ; U16.14@114.036,94.683 cw(c114.316,94.25) 114.681,94.615 ; U16.14@114.036,94.683 cw(c114.316,94.25) 114.681,94.615 ; U16.14@114.036,94.683 cw(c114.316,94.25) 114.681,94.615 ; U16.14@114.08,94.696 cw(c114.08,93.441) 114.968,94.328 ; U16.14@114.08,94.696 cw(c114.08,93.441) 114.968,94.328 ; U16.14@114.08,94.696 cw(c114.08,93.441) 114.968,94.328 ; U16.14@114.08,94.696 cw(c114.08,93.441) 114.968,94.328 ; 115.598,93.698 ccw(c117.983,96.083) C64.1@117.983,92.71 ; 115.598,93.698 ccw(c117.983,96.083) C64.1@117.983,92.71 ; 115.598,93.698 ccw(c117.983,96.083) C64.1@117.983,92.71 ; 115.598,93.698 ccw(c117.983,96.083) C64.1@117.983,92.71 ; 116.882,93.005 cw(c116.507,91.604) C64.1@117.763,92.329 ; 116.882,93.005 cw(c116.507,91.604) C64.1@117.763,92.329 ; 116.882,93.005 cw(c116.507,91.604) C64.1@117.763,92.329 ; 116.882,93.005 cw(c116.507,91.604) C64.1@117.763,92.329 ; 116.882,93.005 cw(c116.507,91.604) C64.1@117.763,92.329 ; 116.882,93.005 cw(c116.507,91.604) C64.1@117.763,92.329 ; 116.899,92.397 ccw(c117.983,93.481) C64.1@117.983,91.948 ; 116.899,92.397 ccw(c117.983,93.481) C64.1@117.983,91.948 ; 116.899,92.397 ccw(c117.983,93.481) C64.1@117.983,91.948 ; 116.899,92.397 ccw(c117.983,93.481) C64.1@117.983,91.948 ; 117.232,92.86 ccw(c117.701,93.329) C64.1@117.905,92.698 ; 117.232,92.86 ccw(c117.701,93.329) C64.1@117.905,92.698 ; 117.232,92.86 ccw(c117.701,93.329) C64.1@117.905,92.698 ; 117.232,92.86 ccw(c117.701,93.329) C64.1@117.905,92.698
NetC66_2: C66.2 R104.2 U16.8 | length 21.2
  Top Layer w0.508: C66.2@92.964,93.599 93.218,93.345 U16.8@100.13,93.345 ; C66.2@93.233,93.741 ccw(c94.19,94.698) 94.19,93.345 ; C66.2@92.979,93.076 cw(c93.63,92.425) 93.63,93.345 ; C66.2@92.979,93.076 cw(c93.63,92.425) 93.63,93.345 ; C66.2@92.979,93.076 cw(c93.63,92.425) 93.63,93.345 ; C66.2@92.979,93.614 ccw(c93.63,94.265) 93.63,93.345 ; C66.2@92.979,93.614 ccw(c93.63,94.265) 93.63,93.345 ; C66.2@92.979,93.614 ccw(c93.63,94.265) 93.63,93.345 ; 94.532,93.345 ccw(c94.532,94.698) R104.2@95.489,93.741 ; 94.532,93.345 ccw(c94.532,94.698) R104.2@95.489,93.741 ; 94.532,93.345 ccw(c94.532,94.698) R104.2@95.489,93.741 ; 94.532,93.345 ccw(c94.532,94.698) R104.2@95.489,93.741 ; R104.2@96.027,93.741 ccw(c96.984,94.698) 96.984,93.345 ; R104.2@96.027,93.741 ccw(c96.984,94.698) 96.984,93.345 ; R104.2@96.027,93.741 ccw(c96.984,94.698) 96.984,93.345 ; R104.2@96.027,93.741 ccw(c96.984,94.698) 96.984,93.345
NetD2_1: D2.1 R17.2 | length 18.8
  Top Layer w0.254: R17.2@96.266,19.177 97.536,19.177 ; D2.1@100.56,17.422 99.291,17.422 ; R17.2@96.77,18.837 cw(c97.536,18.145) 97.536,19.177 ; R17.2@96.77,18.837 cw(c97.536,18.145) 97.536,19.177 ; R17.2@96.77,18.837 cw(c97.536,18.145) 97.536,19.177 ; R17.2@96.77,18.837 cw(c97.536,18.145) 97.536,19.177 ; R17.2@96.77,19.517 ccw(c97.536,20.209) 97.536,19.177 ; R17.2@96.77,19.517 ccw(c97.536,20.209) 97.536,19.177 ; R17.2@96.77,19.517 ccw(c97.536,20.209) 97.536,19.177 ; R17.2@96.77,19.517 ccw(c97.536,20.209) 97.536,19.177 ; 97.536,19.177 99.291,17.422 ; 99.291,17.422 cw(c99.291,16.391) D2.1@100.056,17.082 ; 99.291,17.422 ccw(c99.291,18.453) D2.1@100.056,17.763 ; 99.291,17.422 cw(c99.291,16.391) D2.1@100.056,17.082 ; 99.291,17.422 ccw(c99.291,18.453) D2.1@100.056,17.763 ; 99.291,17.422 cw(c99.291,16.391) D2.1@100.056,17.082 ; 99.291,17.422 ccw(c99.291,18.453) D2.1@100.056,17.763 ; 99.291,17.422 cw(c99.291,16.391) D2.1@100.056,17.082 ; 99.291,17.422 ccw(c99.291,18.453) D2.1@100.056,17.763
NetD3_1: D3.1 R18.2 | length 20.2
  Top Layer w0.254: R18.2@96.266,21.844 97.79,21.844 99.037,20.597 D3.1@100.56,20.597 ; R18.2@96.752,21.485 cw(c97.619,20.618) 97.619,21.844 ; R18.2@96.752,21.485 cw(c97.619,20.618) 97.619,21.844 ; R18.2@96.752,21.485 cw(c97.619,20.618) 97.619,21.844 ; R18.2@96.752,21.485 cw(c97.619,20.618) 97.619,21.844 ; R18.2@96.752,22.203 ccw(c97.619,23.07) 97.619,21.844 ; R18.2@96.752,22.203 ccw(c97.619,23.07) 97.619,21.844 ; R18.2@96.752,22.203 ccw(c97.619,23.07) 97.619,21.844 ; R18.2@96.752,22.203 ccw(c97.619,23.07) 97.619,21.844 ; 99.207,20.597 cw(c99.207,19.371) D3.1@100.074,20.238 ; 99.207,20.597 ccw(c99.207,21.824) D3.1@100.074,20.956 ; 99.207,20.597 cw(c99.207,19.371) D3.1@100.074,20.238 ; 99.207,20.597 ccw(c99.207,21.824) D3.1@100.074,20.956 ; 99.207,20.597 cw(c99.207,19.371) D3.1@100.074,20.238 ; 99.207,20.597 ccw(c99.207,21.824) D3.1@100.074,20.956 ; 99.207,20.597 cw(c99.207,19.371) D3.1@100.074,20.238 ; 99.207,20.597 ccw(c99.207,21.824) D3.1@100.074,20.956
NetD4_1: D4.1 R19.2 | length 20
  Top Layer w0.254: R19.2@96.266,24.511 98.425,24.511 99.164,23.772 D4.1@100.56,23.772 ; R19.2@96.752,24.152 cw(c97.619,23.285) 97.619,24.511 ; R19.2@96.752,24.152 cw(c97.619,23.285) 97.619,24.511 ; R19.2@96.752,24.152 cw(c97.619,23.285) 97.619,24.511 ; R19.2@96.752,24.152 cw(c97.619,23.285) 97.619,24.511 ; R19.2@96.752,24.87 ccw(c97.619,25.737) 97.619,24.511 ; R19.2@96.752,24.87 ccw(c97.619,25.737) 97.619,24.511 ; R19.2@96.752,24.87 ccw(c97.619,25.737) 97.619,24.511 ; R19.2@96.752,24.87 ccw(c97.619,25.737) 97.619,24.511 ; 99.207,23.772 cw(c99.207,22.546) D4.1@100.074,23.413 ; 99.207,23.772 ccw(c99.207,24.999) D4.1@100.074,24.131 ; 99.207,23.772 cw(c99.207,22.546) D4.1@100.074,23.413 ; 99.207,23.772 ccw(c99.207,24.999) D4.1@100.074,24.131 ; 99.207,23.772 cw(c99.207,22.546) D4.1@100.074,23.413 ; 99.207,23.772 ccw(c99.207,24.999) D4.1@100.074,24.131 ; 99.207,23.772 cw(c99.207,22.546) D4.1@100.074,23.413 ; 99.207,23.772 ccw(c99.207,24.999) D4.1@100.074,24.131
NetD5_1: D5.1 R20.2 | length 22.8
  Top Layer w0.254: R20.2@96.266,27.178 96.37,27.074 D5.1@100.56,27.074 ; R20.2@96.573,27.358 ccw(c97.257,28.042) 97.257,27.074 ; R20.2@96.573,27.358 ccw(c97.257,28.042) 97.257,27.074 ; R20.2@96.573,27.358 ccw(c97.257,28.042) 97.257,27.074 ; R20.2@96.573,27.358 ccw(c97.257,28.042) 97.257,27.074 ; R20.2@96.752,26.819 cw(c97.369,26.202) 97.369,27.074 ; R20.2@96.752,26.819 cw(c97.369,26.202) 97.369,27.074 ; R20.2@96.752,26.819 cw(c97.369,26.202) 97.369,27.074 ; R20.2@96.752,26.819 cw(c97.369,26.202) 97.369,27.074 ; R20.2@96.752,27.537 ccw(c97.87,28.655) 97.87,27.074 ; R20.2@96.752,27.537 ccw(c97.87,28.655) 97.87,27.074 ; R20.2@96.752,27.537 ccw(c97.87,28.655) 97.87,27.074 ; R20.2@96.752,27.537 ccw(c97.87,28.655) 97.87,27.074 ; 99.207,27.074 cw(c99.207,25.848) D5.1@100.074,26.715 ; 99.207,27.074 ccw(c99.207,28.301) D5.1@100.074,27.433 ; 99.207,27.074 cw(c99.207,25.848) D5.1@100.074,26.715 ; 99.207,27.074 ccw(c99.207,28.301) D5.1@100.074,27.433 ; 99.207,27.074 cw(c99.207,25.848) D5.1@100.074,26.715 ; 99.207,27.074 ccw(c99.207,28.301) D5.1@100.074,27.433 ; 99.207,27.074 cw(c99.207,25.848) D5.1@100.074,26.715 ; 99.207,27.074 ccw(c99.207,28.301) D5.1@100.074,27.433